# Altium PCB PCB1.PcbDoc
Units mil, origin at the board's own origin, x right, y up, seen from the top; angles counter-clockwise.
Board outline 1600 x 1000 mil, 2 copper layers (Top Layer, Bottom Layer); 9 components, 7 nets, 25 pads, 5 vias.
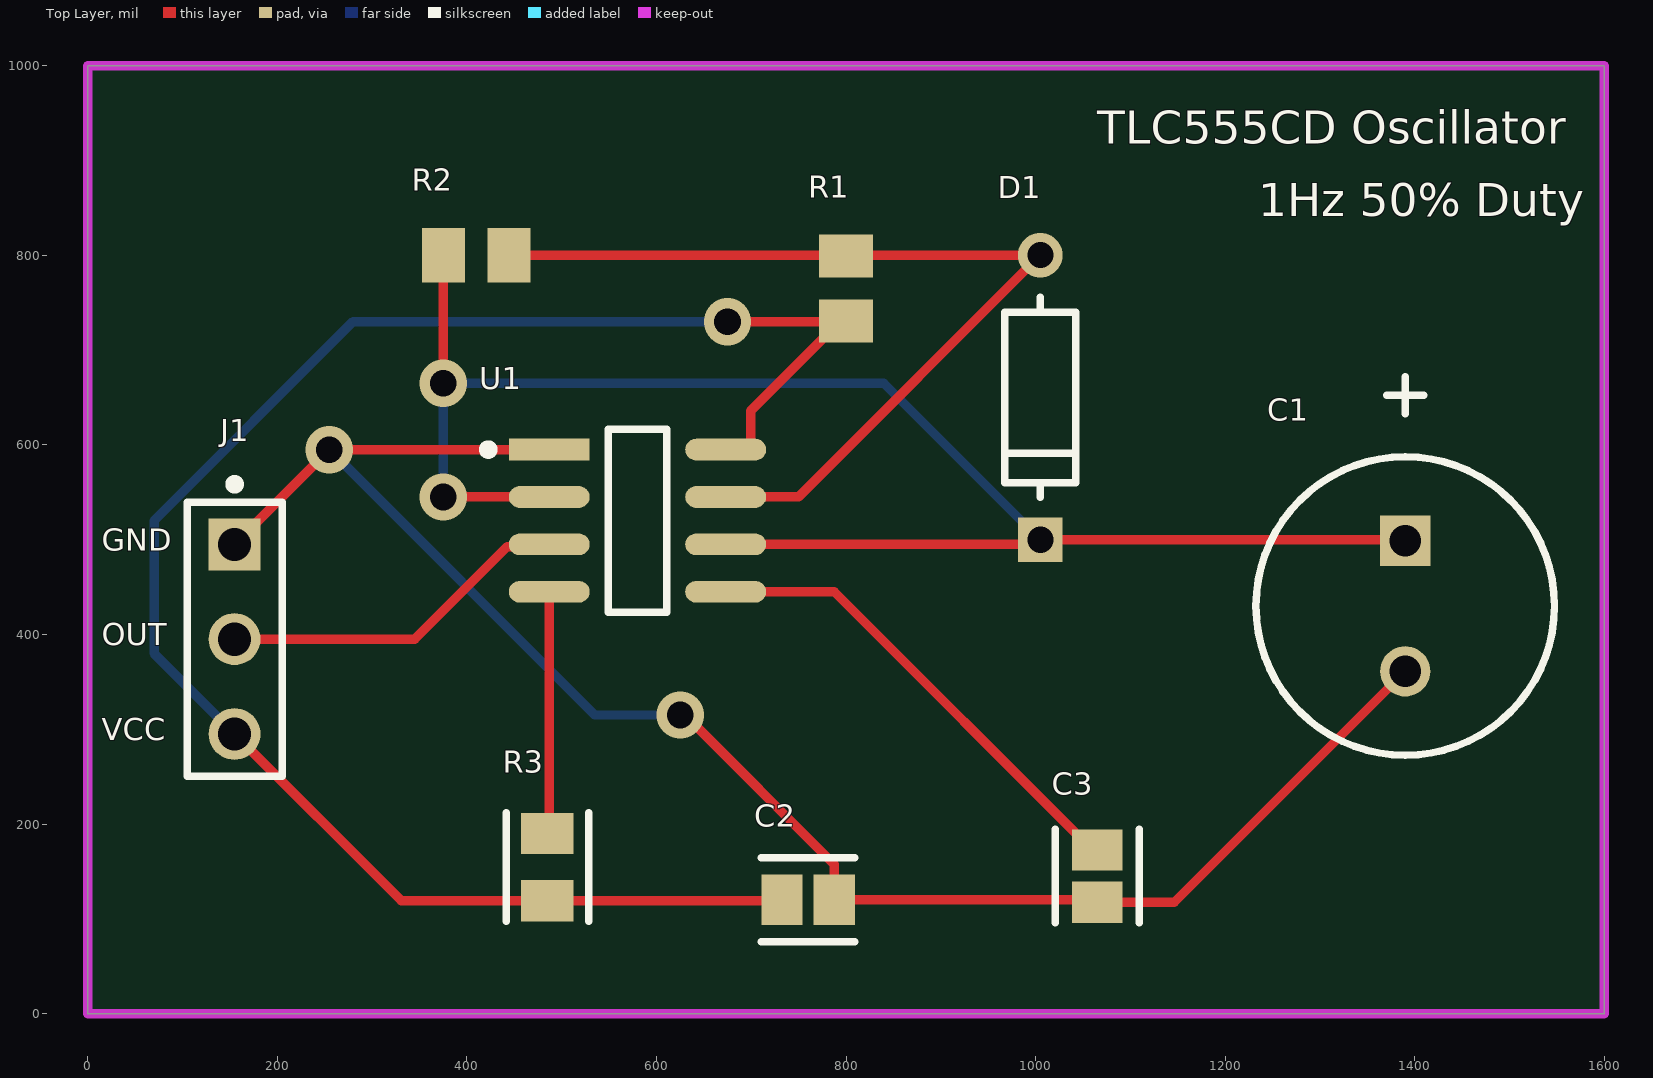
[diagram p0: Top Layer view]
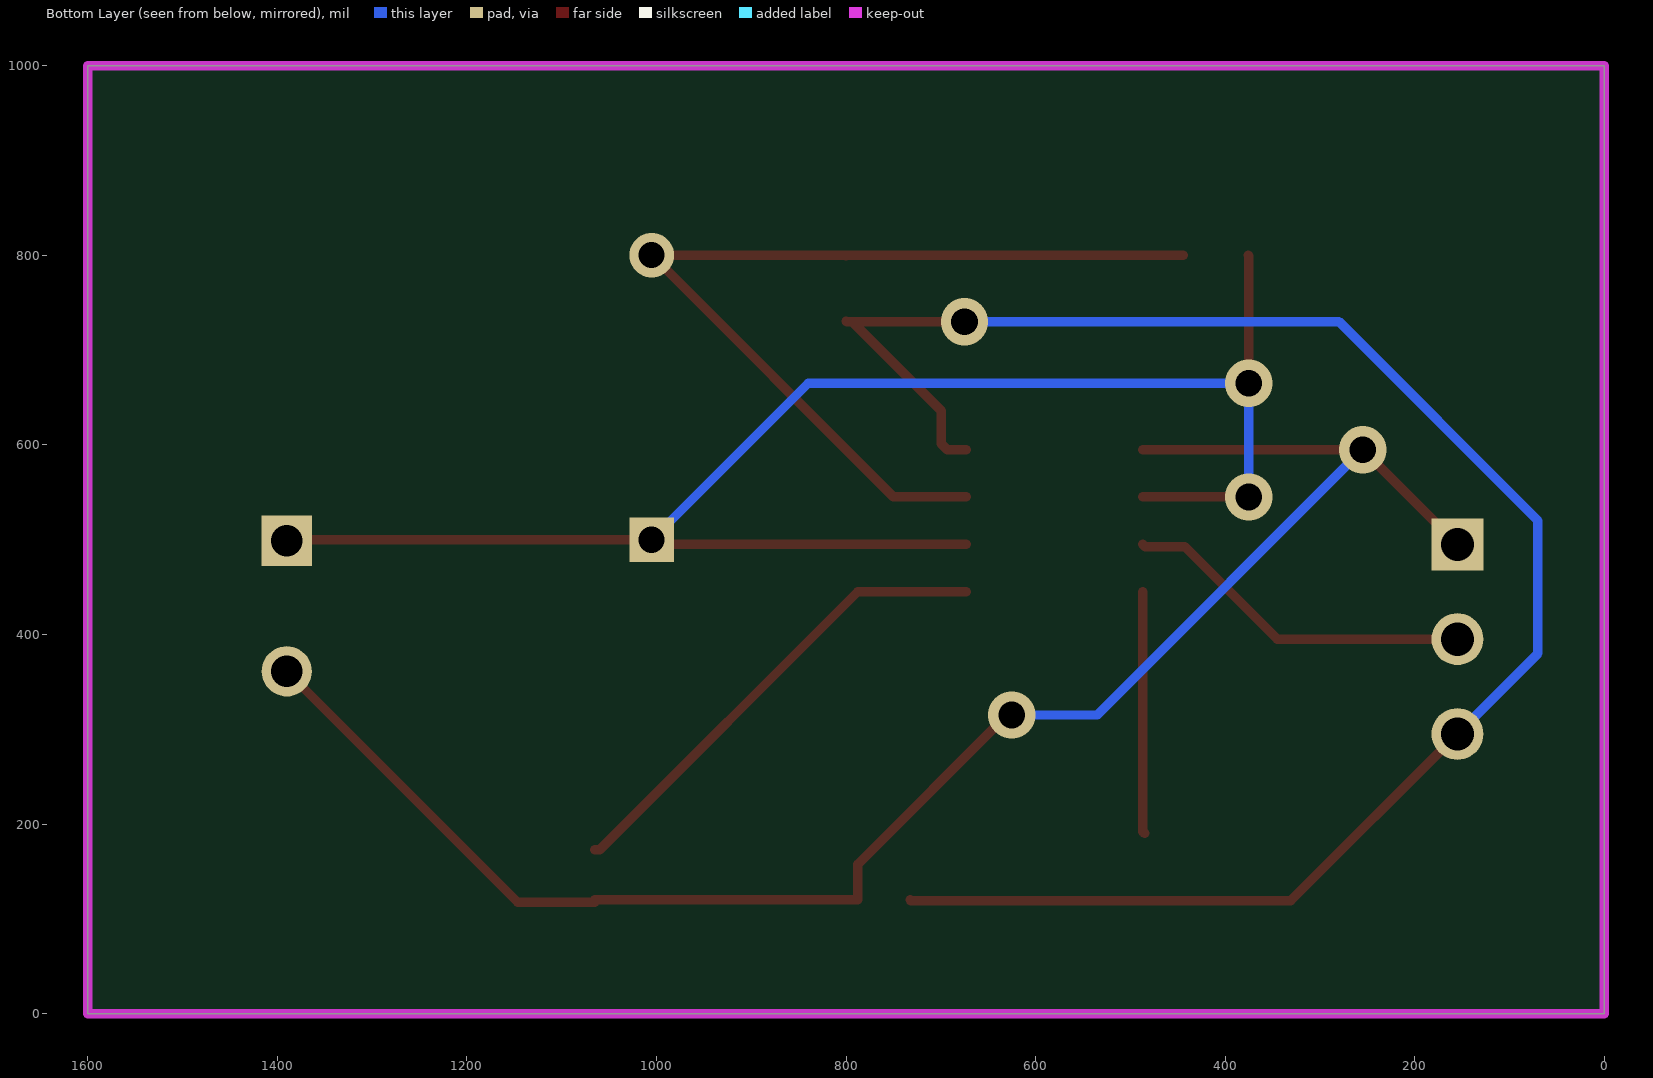
[diagram p1: Bottom Layer view, seen from below]
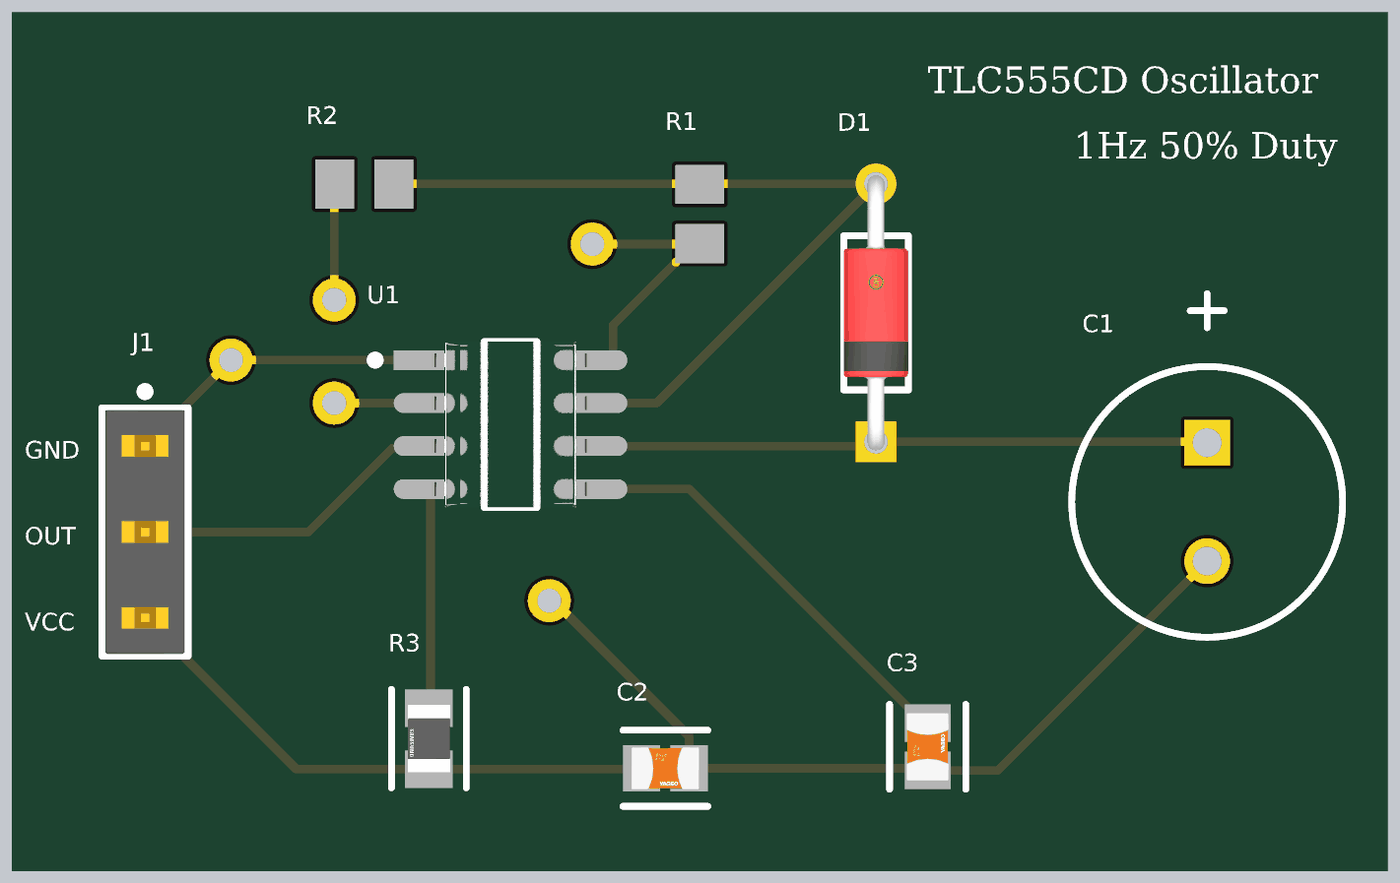
[diagram p2: 3D render of the assembled board from above, using the file's embedded part models]

## Layer stack, top to bottom
Top Solder: solder mask 0.4, Solder Resist, Dk 3.5
Top Layer: signal copper 1.4
Dielectric 1: dielectric 12.6, FR-4, Dk 4.8
Bottom Layer: signal copper 1.4
Bottom Solder: solder mask 0.4, Solder Resist, Dk 3.5

## Board outline
0,0 0,1000 1600,1000 1600,0

## Design rules (kind name [scope] priority, off if disabled: settings)
Clearance [All] p1: gap=10 ignorepadtopadclearanceinfootprint=FALSE
PolygonConnect [All] p1: connectstyle=Relief reliefconductorwidth=10 reliefentries=4 polygonreliefangle="90 Angle" airgapwidth=10
RoutingVias [All] p1: holewidth=28 width=50 viastyle="Through Hole" minholewidth=28 minwidth=50 maxholewidth=28 maxwidth=50
SolderMaskExpansion [All] p1: expansion=4 istentingtop=FALSE
SupplyNets "Schematic Supply Nets_1" [InNet('VCC')] p1: voltage=0.000
SupplyNets "Schematic Supply Nets" [InNet('GND')] p2: voltage=0.000
Width [All] p1: maxlimit=10 minlimit=10 preferedwidth=10
30 further rules are at their usual default settings.

## Components (designator, comment, footprint, x,y, rotation, side; value= is the part's Value field where it differs from the comment)
C1 "100u" CAPPR60-350-1150X800X1300 1390,430 r270 top
C2 "0.1u" FP-CC0805-0_85-IPC_C 760,120 r0 top value="100 nF"
C3 "0.1u" FP-CC0805-0_85-IPC_C 1065,145 r90 top value="100 nF"
D1 "1N4148" FP-017AG-MFG 1005,650 r90 top
J1 "87224-3" FP-87224-3-MFG 155,395 r270 top
R1 "3.9k" RESC2013X70X40NL20T20 800,765 r270 top
R2 "7.5k" RESC2013X70X40NL20T20 410,800 r0 top
R3 "1k" FP-RC2012-IPC_B 485,154.54 r270 top
U1 "TLC555CDR" FP-D0008A-IPC_B 580,520 r0 top

## Footprints (in the part's own frame and the unit in brackets; to place one, negate y for a bottom-side part, rotate by r counter-clockwise, add the part's x,y. Pads: shape width x height; smd on the part's side, far side on the other; paste and mask are expansions set on the pad)
CAPPR60-350-1150X800X1300 [mm] "THD, 2-Leads, Dia 8mm, Body Length 11.5mm"
  rect 1.35x1.35 hole 0.85: 1(-1.75,0)
  round 1.35 hole 0.85: 2(1.75,0)
  silkscreen extent -6.15,-4 4,4, body extent -4,-4 4,4, height 13
FP-017AG-MFG [mm]
  rect 1.2x1.2 hole 0.7 paste-2539.97 mask+0: 1(-3.813,0)
  round 1.2 hole 0.7 paste-2539.97 mask+0: 2(3.813,0)
  silkscreen extent -2.68,-0.95 2.68,0.95, body extent -4.51,-1.05 4.51,1.05, height 0.25
FP-87224-3-MFG [mil]
  rect 54.69x54.69 hole 35 paste-99999 mask+0: 1(-100,0)
  round 54.69 hole 35 paste-99999 mask+0: 2(0,0) 3(100,0)
  silkscreen extent -168,-50 145,50, body extent -148,-54 148,54, height 10
FP-CC0805-0_85-IPC_C [mil]
  rect 43.49x53.39 smd paste+0 mask+0: 1(-27.59,0) 2(27.59,0)
  silkscreen extent -49,-44 49,44, body extent -53,-32 53,32, height 10
FP-D0008A-IPC_B [mil]
  rect 85.4x22.92 smd paste+0 mask+0: 1(-93.06,75)
  rrect100% 85.4x22.92 smd paste+0 mask+0: 2(-93.06,25) 3(-93.06,-25) 4(-93.06,-75) 5(93.06,-75) 6(93.06,-25) 7(93.06,25) 8(93.06,75)
  silkscreen extent -162,-97 31,97, body extent -146,-106 146,106, height 10
FP-RC2012-IPC_B [mil]
  rect 43.5x55.44 smd paste+0 mask+0: 1(-35.46,0) 2(35.46,0)
  silkscreen extent -57,-43 57,43, body extent -67,-38 67,38, height 10
RESC2013X70X40NL20T20 [mm] "Chip Resistor, 2-Leads, Body 2.00x1.25mm, IPC Medium Density"
  rect 1.15x1.45 smd: 1(-0.875,0) 2(0.875,0)
  body extent -1.1,-0.72 1.1,0.72, height 0.7

## Part data
C1: library part CMP-2000-07363-1, "Aluminum Electrolytic Capacitor, 100 uF, +/- 20%, 35 V, -55 to 105 degC, 2-Pin THD, RoHS, Bulk", Capacitance=100μF, Case Size=0.315In.Dia.x0.453In.L(8mmDia.x11.5mmL), Manufacturer=Nichicon, Package Description="2-Pin Through Hole Device, Dia 8 mm, Body Length 11.5 mm", Package Reference=CAPPR60-350-1150X800X1300, Temperature, Operating, Minimum=-55Deg.C, Tolerance=-20,+20%, Voltage, Rating=35VDC, Brand/Series=UPWSeries, Configuration=Radial,Can, Datasheet URL=http://nichicon-us.com/english/products/pdfs/e-upw.pdf, Datasheet Version=08/2015, Lead Spacing=0.138In.(3.50mm)mm, Manufacturer URL=http://www.nichicon.co.jp/english/, Material, Element=AluminumElectrolytic, Mounting Technology=ThroughHole, Mounting Type=PCB, Termination=Through-hole
C2 C3: library part CMP-1036-04410-2, "CAP CER 0.1UF 25V X7R 0805", Capacitance="100 nF", Manufacturer=Yageo, Manufacturer Part Number=CC0805KRX7R8BB104, Package=CC0805-0.85, Temperature="-30°C to +85°C", Temperature Characteristic=X7R, Temperature Range High=+85°C, Temperature Range Low=-30°C, Tolerance=0.1, Voltage Rating="25 V", Automotive=No, Category=Cap, ComponentLink2Description=Datasheet, ComponentLink2URL=http://www.yageo.com/documents/recent/UPY-GPHC_Y5V_6.3V-to-50V_8.pdf, Device Class L1="Passive Components", Device Class L2=Capacitors, Device Class L3="Ceramic Capacitors", Digikey Description="CAP CER 0.1UF 25V X7R 0805", Footprint Url=http://www.yageo.com/exep/pages/download/literatures/UPY-C_GEN_24.pdf, Height=0.95mm, Ipc Land Pattern Name=CAPC200125X85, Lead Free=Yes, Material=Ceramic, Mouser Description="Multilayer Ceramic Capacitors MLCC - SMD/SMT 100nF 25V X7R 10%", Octopart=https://octopart.com/cc0805krx7r8bb104-yageo-39467766, RoHS=TRUE
D1: library part CMP-07163-000046-1, "DIODE GEN PURP 100V 200MA DO35", Average Rectified Current=200mA, Capacitance=4pF, Case/Package=DO-35, Current=4A, Forward Current=300mA, Forward Voltage=1V, Max Forward Surge Current (Ifsm)=1A, Max Operating Temperature=175°C, Max Power Dissipation=500mW, Max Repetitive Reverse Voltage (Vrrm)=100V, Max Reverse Current=5uA, Min Operating Temperature=-65°C, Package Quantity=2000, Contact Plating=Tin, Current Rating=200mA, Diameter=1.91mm, Element Configuration=Single, Height=4.56mm, Lead Free="Lead Free", Length=4.56mm, Max Reverse Voltage (DC)=100V, Max Surge Current=4A, Mount="Through Hole", Number of Pins=2, Output Current=200mA, Outside Diameter=1.85mm, Packaging=Bulk, Peak Non-Repetitive Surge Current=4A, Polarity=Standard, Power Dissipation=500mW, Radiation Hardening=No, REACH SVHC="No SVHC", Recovery Time=4ns, Reverse Recovery Time=4ns, Reverse Voltage=100V, Series=-, Voltage=100V, Voltage Rating (DC)=100V, Weight=0.01lb, Width=1.91mm
J1: library part CMP-2000-05697-2, "CONN HEADER VERT 3POS 2.54MM", Color=Black, Contact Current Rating=3A, Flammability Rating="UL94 V-0", High Temperature Housing=No, Max Operating Temperature=105°C, Min Operating Temperature=-65°C, Package Quantity=520, Approvals=CSA, Board Standoff="No (Without)", Connector Type=Plug, Contact Gender=Male, Contact Material=Bronze, Contact Mating Length=8.08mm, Contact Plating=Gold, Contact Post Length=0.125inch, Contact Protection="No (Without)", Contact Shape=Square, Contact Type="Male Pin", Current Rating=3A, Depth=2.54mm, ELV=Compliant, Gasket="No (Without)", High Speed Serial Data Connector=No, Housing Color=Black, Housing Material=Thermoplastic, Keyed=No, Lead Free="Lead Free", Length=7.21mm, Mating Alignment="No (Without)", Mating Connector Lock="No (Without)", Mount="Through Hole", Number of Contacts=3, Number of Positions=3, Number of Rows=1, Orientation=Straight, Packaging=Carton, PCB Mount Retention=Without, PCB Mounting Orientation=Vertical, PCB Thickness=1.397mm, Pitch=2.54mm, Radiation Hardening=No, RoHS Compliant=Yes, Row Spacing=2.54mm, Selectively Loaded="No (Without)", Series="AMPMODU MOD II", Stabilizers="No (Without)", Strain Relief="No (Without)", Termination="Through Hole"
R1: library part CMP-2001-00541-1, Manufacturer=Panasonic, Part Number=ERJ6ENF3901V
R2: library part CMP-2001-00289-1, Manufacturer=Panasonic, Part Number=ERJ-6ENF7501V
R3: library part CMP-13261-003265-1, "Res Thick Film 0805 1kΩ 1% 0.125W ±100ppm/°C Molded SMD T/R", Case Code (Imperial)=0805, Case Code (Metric)=2012, Max Operating Temperature=155°C, Max Power Dissipation=125mW, Min Operating Temperature=-55°C, Resistance=1kR, Temperature Coefficient=100ppm/°C, Tolerance=1%, Voltage Rating (DC)=150V, Case/Package=0805, Composition="Thick Film", Contact Plating=Tin, Depth=1.25mm, Features="Moisture Resistant", Height=0.024inch, Lead Free="Lead Free", Length=0.079inch, Military Standard=Not, Number of Terminations=2, Packaging="Tape and Reel", Radiation Hardening=No, Width=0.049inch
U1: library part CMP-04857-000001-1, "IC OSC SGL TIMER 2.1MHZ 8-SOIC", Case/Package=SOIC, Current Rating=250A, Frequency=2.1MHz, High Level Output Current=-10mA, Low Level Output Current=100mA, Max Operating Temperature=125°C, Max Power Dissipation=725mW, Max Supply Voltage=15V, Min Operating Temperature=-40°C, Min Supply Voltage=2V, Operating Supply Current=360uA, Package Quantity=2500, Quiescent Current=250uA, Height=1.58mm, Lead Free="Lead Free", Length=4.9mm, Mount="Surface Mount", Number of Channels=1, Number of Pins=8, Number of Timers/Counters=1, Packaging="Tape and Reel", Power Dissipation=725mW, Radiation Hardening=No, REACH SVHC="No SVHC", Termination=SMD/SMT, Weight=0.002561oz, Width=3.91mm

## Via types
v1: diameter 50, hole 28, Top Layer to Bottom Layer, 5 vias

## Nets (pads, with @x,y where several pads share a name; then routed paths per layer and width w, separated by ;. In a path a pad name is that pad's centre, name@x,y a point inside that pad or via, vN(x,y) a via of type N, cw(c..) or ccw(c..) an arc to the next point about the centre after c; other vN are vias at no path point)
GND: C1.2 C2.2 C3.1 J1.1 U1.1 | length 1828
  Top Layer w10: J1.1 v1(255,595) U1.1 ; v1(625,315) 630,315 787.59,157.41 C2.2 C3.1@1065,120 ; C3.1 1146.31,117.41 C1.2
  Bottom Layer w10: v1(255,595) 535,315 v1(625,315)
NetC1_1: C1.1 D1.1 R2.1 U1.2 U1.6 | length 1784.9
  Top Layer w10: v1(375,545) U1.2 ; v1(375,665) 375,799.45 R2.1 ; U1.6 1000.12,495 D1.1 1389.02,499.88 C1.1
  Bottom Layer w10: v1(375,545) v1(375,665) 839.88,665 D1.1
NetC3_2: C3.2 U1.5 | length 504.8
  Top Layer w10: U1.5 787.64,445 1060.05,172.59 C3.2
NetD1_2: D1.2 R1.1 R2.2 U1.7 | length 998.7
  Top Layer w10: R2.2 799.45,800 R1.1 800.67,800.12 D1.2 749.88,545 U1.7
NetR3_1: R3.1 U1.4 | length 255.8
  Top Layer w10: R3.1 486.94,191.94 U1.4
OUT: J1.2 U1.3 | length 373.4
  Top Layer w10: J1.2 345,395 442.53,492.53 484.47,492.53 U1.3
VCC: C2.1 J1.3 R1.2 R3.2 U1.8 | length 1924.9
  Top Layer w10: J1.3 330.92,119.08 R3.2 731.49,119.08 C2.1 ; U1.8 693.33,595 699.3,600.97 699.3,635.75 R1.2@793.54,730 ; v1(675,730) R1.2@793.54,730 ; R1.2 799.45,730 R1.2@793.54,730
  Bottom Layer w10: J1.3 70,380 70,520 280,730 v1(675,730)

## Keep-outs
Keep-Out Layer:
  the board outline again, w10

## Silkscreen, mask and mechanical layers (free items; w line width, h text height)
Top Overlay:
  text "TLC555CD Oscillator" at 1065,905.89 h60
  text "1Hz 50% Duty" at 1235,829.71 h60
  text "GND" at 15,480.48 h40
  text "OUT" at 15,380.48 h40
  text "VCC" at 15,280.48 h40